# Altium PCB SolarArray3.PcbDoc
Units mm, origin at the board's own origin, x right, y up, seen from the top; angles counter-clockwise.
Board outline 82 x 320 mm, 2 copper layers (Top Layer, Bottom Layer), stack 1.567 mm thick; 67 components, 37 nets, 167 pads, 4 vias.
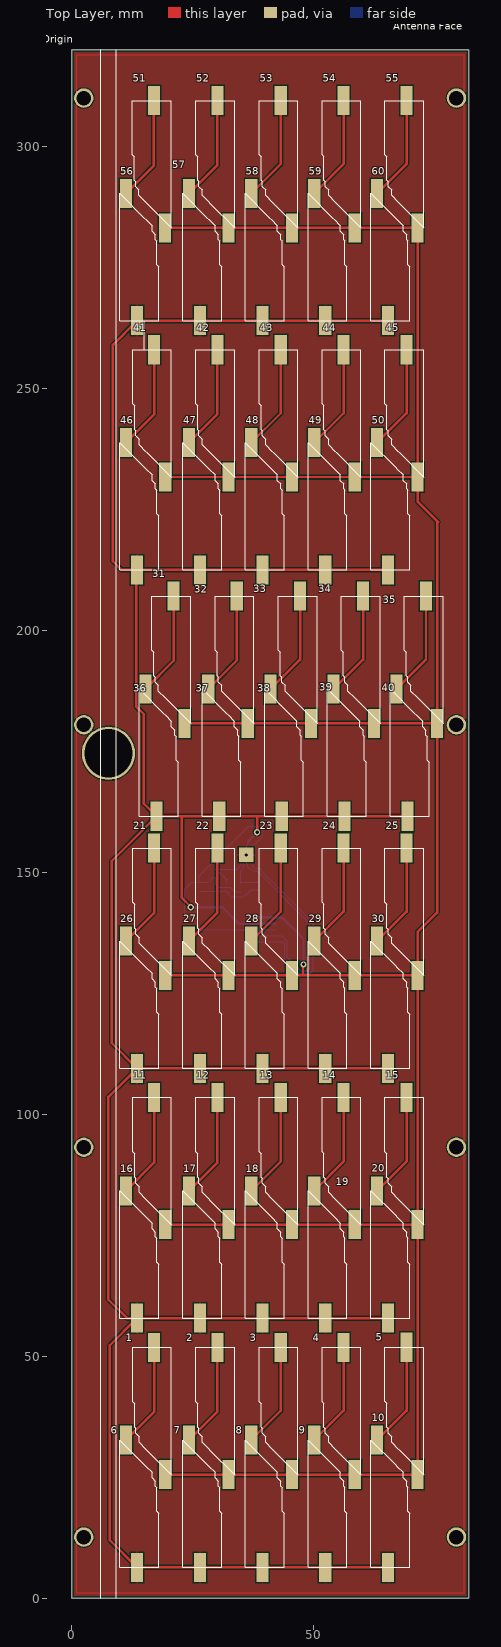
[diagram p0: Top Layer view]
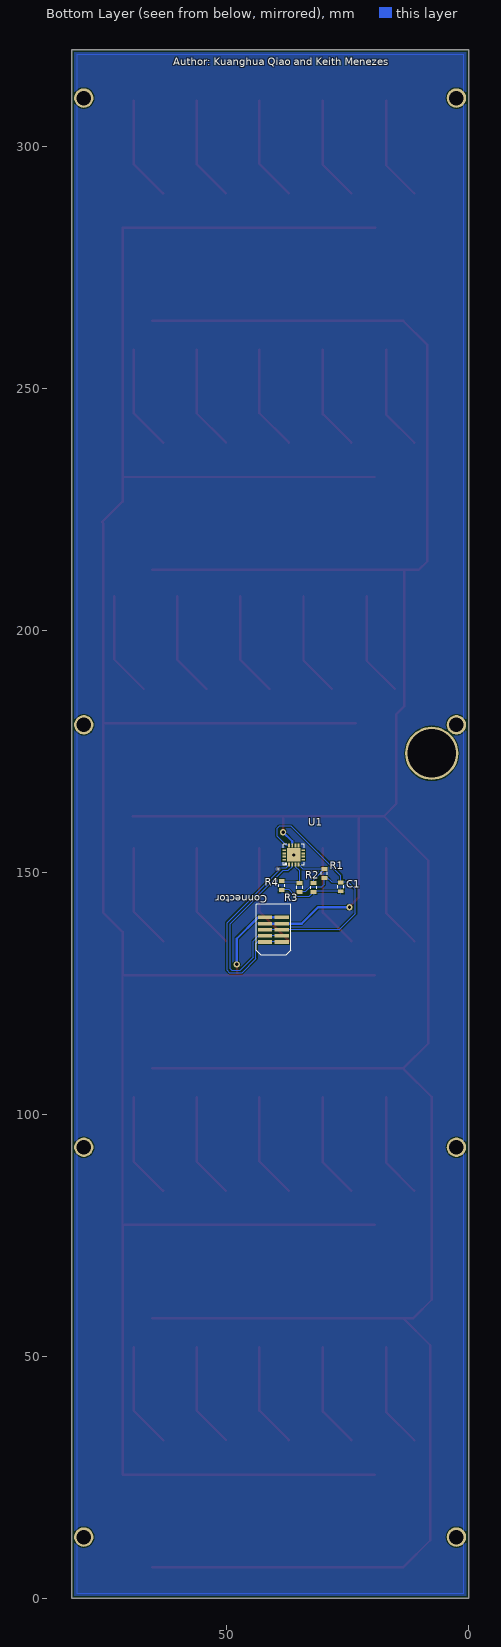
[diagram p1: Bottom Layer view, seen from below]
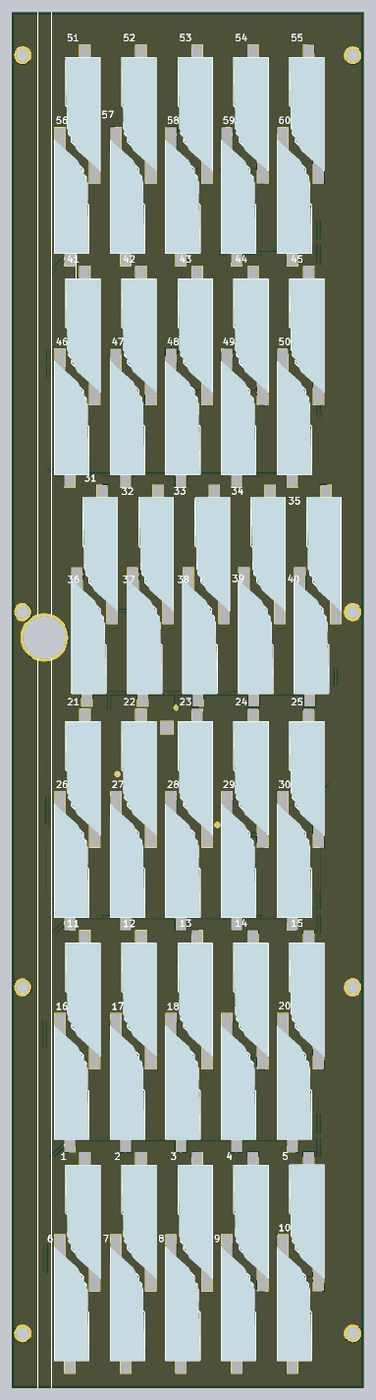
[diagram p2: 3D render of the assembled board from above, using the file's embedded part models]

## Layer stack, top to bottom
Top Solder: solder mask 0.0102, Solder Resist, Dk 3.5
Top Layer: signal copper 0.0356
Dielectric 1: dielectric 1.4961, FR-4, Dk 4.8
Bottom Layer: signal copper 0.0356
Bottom Solder: solder mask 0.0102, Solder Resist, Dk 3.5

## Board outline
82,0 82,320 0,320 0,0

## Design rules (kind name [scope] priority, off if disabled: settings)
Clearance [All] p1: gap=0.254 ignorepadtopadclearanceinfootprint=FALSE except(0: Arc-Hole Track-Hole SMDPad-Hole THPad-Hole Via-Hole Fill-Hole Poly-Hole Region-Hole Text-Hole)
PolygonConnect [All] p1: connectstyle=Relief reliefconductorwidth=0.254 reliefentries=4 polygonreliefangle="90 Angle" airgapwidth=0.254
RoutingVias [All] p1: holewidth=0.711 width=1.27 viastyle="Through Hole" minholewidth=0.711 minwidth=1.27 maxholewidth=0.711 maxwidth=1.27
SolderMaskExpansion [All] p1: expansion=0.102
Width [All] p1: maxlimit=1 minlimit=0.254 preferedwidth=0.254 minimp=50.000000 maximp=50.000000 favimp=50.000000
30 further rules are at their usual default settings.

## Components (designator, comment, footprint, x,y, rotation, side; value= is the part's Value field where it differs from the comment)
1 "Trisol X Solar Wing" PCBComponent_1 20.6,22.376 r90 top
2 "Trisol X Solar Wing" PCBComponent_1 33.656,22.376 r90 top
3 "Trisol X Solar Wing" PCBComponent_1 46.756,22.376 r90 top
4 "Trisol X Solar Wing" PCBComponent_1 59.756,22.376 r90 top
5 "Trisol X Solar Wing" PCBComponent_1 72.766,22.416 r90 top
6 "Trisol X Solar Wing" PCBComponent_1 9.944,35.864 r270 top
7 "Trisol X Solar Wing" PCBComponent_1 22.944,35.864 r270 top
8 "Trisol X Solar Wing" PCBComponent_1 35.844,35.864 r270 top
9 "Trisol X Solar Wing" PCBComponent_1 48.844,35.864 r270 top
10 "Trisol X Solar Wing" PCBComponent_1 61.844,35.864 r270 top
11 "Trisol X Solar Wing" PCBComponent_1 20.6,74.036 r90 top
12 "Trisol X Solar Wing" PCBComponent_1 33.656,74.036 r90 top
13 "Trisol X Solar Wing" PCBComponent_1 46.756,74.036 r90 top
14 "Trisol X Solar Wing" PCBComponent_1 59.756,74.036 r90 top
15 "Trisol X Solar Wing" PCBComponent_1 72.766,74.036 r90 top
16 "Trisol X Solar Wing" PCBComponent_1 9.944,87.364 r270 top
17 "Trisol X Solar Wing" PCBComponent_1 22.944,87.364 r270 top
18 "Trisol X Solar Wing" PCBComponent_1 35.844,87.364 r270 top
19 "Trisol X Solar Wing" PCBComponent_1 48.844,87.364 r270 top
20 "Trisol X Solar Wing" PCBCOMPONENT_1 61.844,87.364 r270 top
21 "Trisol X Solar Wing" PCBComponent_1 20.6,125.536 r90 top
22 "Trisol X Solar Wing" PCBComponent_1 33.656,125.536 r90 top
23 "Trisol X Solar Wing" PCBComponent_1 46.756,125.536 r90 top
24 "Trisol X Solar Wing" PCBComponent_1 59.756,125.536 r90 top
25 "Trisol X Solar Wing" PCBComponent_1 72.766,125.536 r90 top
26 "Trisol X Solar Wing" PCBComponent_1 9.944,138.964 r270 top
27 "Trisol X Solar Wing" PCBComponent_1 22.944,138.964 r270 top
28 "Trisol X Solar Wing" PCBComponent_1 35.844,138.964 r270 top
29 "Trisol X Solar Wing" PCBComponent_1 48.844,138.964 r270 top
30 "Trisol X Solar Wing" PCBComponent_1 61.844,138.964 r270 top
31 "Trisol X Solar Wing" PCBComponent_1 24.6,177.636 r90 top
32 "Trisol X Solar Wing" PCBComponent_1 37.656,177.636 r90 top
33 "Trisol X Solar Wing" PCBComponent_1 50.756,177.636 r90 top
34 "Trisol X Solar Wing" PCBComponent_1 63.756,177.636 r90 top
35 "Trisol X Solar Wing" PCBComponent_1 76.766,177.636 r90 top
36 "Trisol X Solar Wing" PCBComponent_1 13.944,191.064 r270 top
37 "Trisol X Solar Wing" PCBComponent_1 26.944,191.064 r270 top
38 "Trisol X Solar Wing" PCBComponent_1 39.844,191.064 r270 top
39 "Trisol X Solar Wing" PCBComponent_1 52.844,191.064 r270 top
40 "Trisol X Solar Wing" PCBComponent_1 65.844,191.064 r270 top
41 "Trisol X Solar Wing" PCBComponent_1 20.6,228.536 r90 top
42 "Trisol X Solar Wing" PCBComponent_1 33.656,228.536 r90 top
43 "Trisol X Solar Wing" PCBComponent_1 46.756,228.536 r90 top
44 "Trisol X Solar Wing" PCBComponent_1 59.756,228.536 r90 top
45 "Trisol X Solar Wing" PCBComponent_1 72.766,228.536 r90 top
46 "Trisol X Solar Wing" PCBComponent_1 9.944,241.964 r270 top
47 "Trisol X Solar Wing" PCBComponent_1 22.944,241.964 r270 top
48 "Trisol X Solar Wing" PCBComponent_1 35.844,241.964 r270 top
49 "Trisol X Solar Wing" PCBComponent_1 48.844,241.964 r270 top
50 "Trisol X Solar Wing" PCBComponent_1 61.844,241.964 r270 top
51 "Trisol X Solar Wing" PCBComponent_1 20.556,280.036 r90 top
52 "Trisol X Solar Wing" PCBComponent_1 33.656,280.036 r90 top
53 "Trisol X Solar Wing" PCBComponent_1 46.756,280.036 r90 top
54 "Trisol X Solar Wing" PCBComponent_1 59.756,280.036 r90 top
55 "Trisol X Solar Wing" PCBComponent_1 72.766,280.036 r90 top
56 "Trisol X Solar Wing" PCBComponent_1 9.944,293.464 r270 top
57 "Trisol X Solar Wing" PCBComponent_1 22.944,293.464 r270 top
58 "Trisol X Solar Wing" PCBComponent_1 35.844,293.464 r270 top
59 "Trisol X Solar Wing" PCBComponent_1 48.844,293.464 r270 top
60 "Trisol X Solar Wing" PCBComponent_1 61.844,293.464 r270 top
C1 "100pF" 0805 26.4,147 r90 bottom
Connector "TFC-105-02-F-D" TFC-105-X2-XX-D 40.314,138.16 r270 bottom
R1 "1K" 0805 29.8,149.8 r270 bottom
R2 "1K" 0805 32,146.886 r270 bottom
R3 "1K" 0805 34.9,146.9 r270 bottom
R4 "1K" 0805 38.6,147.3 r270 bottom
U1 "ADT7420UCPZ-R2" CP_16_17 36.1,153.6 r90 bottom

## Footprints (in the part's own frame and the unit in brackets; to place one, negate y for a bottom-side part, rotate by r counter-clockwise, add the part's x,y. Pads: shape width x height; smd on the part's side, far side on the other; paste and mask are expansions set on the pad)
0805 [mil]
  rect 32x48 smd: 1(-35.43,0) 2(36,0)
  silkscreen extent -12,-24 12,24
CP_16_17 [mil]
  rect 30x14 smd: 1(-77.5,38.39) 2(-77.5,12.8) 3(-77.5,-12.8) 4(-77.5,-38.39) 9(77.5,-38.39) 10(77.5,-12.8) 11(77.5,12.8) 12(77.5,38.39)
  rect 14x30 smd: 5(-38.39,-77.5) 6(-12.8,-77.5) 7(12.8,-77.5) 8(38.39,-77.5) 13(38.39,77.5) 14(12.8,77.5) 15(-12.8,77.5) 16(-38.39,77.5)
  rect 110x110 smd paste-54.5: 17(0,0)
  silkscreen extent -86,-86 86,86, body extent -81,-81 81,81, height 30
PCBComponent_1 [mm]
  rect 6x2.5 smd: 0(3.164,1.27) 1(29.464,3.556)
  silkscreen extent 3.16,0 29.46,8.03, body extent 3.16,0.06 29.46,8.06, height 0.32
PCBCOMPONENT_1 [mm]
  rect 6x2.5 smd: 0(3.164,1.27) 1(29.464,3.556)
  silkscreen extent 3.16,0 29.46,8.03, body extent 3.16,0.06 29.46,8.06, height 0.32
TFC-105-X2-XX-D [mil]
  rect 29x115 smd mask+2: 1(-100,-67.5) 2(-100,67.5) 3(-50,-67.5) 4(-50,67.5) 5(0,-67.5) 6(0,67.5) 7(50,-67.5) 8(50,67.5) 9(100,-67.5) 10(100,67.5)
  silkscreen extent -208,-140 208,140, body extent -192,-122 183,113, height 220

## Part data
C1: library part CAP0805_1nF
R1 R2 R3 R4: library part RESISTOR0805-RES_1K
U1: "Imported"

## Free pads (board coordinates)
  round 4 hole 3: 1(2.5,12.65) 1(2.5,93.2) 1(2.5,180.5) 1(2.5,310) 1(79.5,12.65) 1(79.5,93.2) 1(79.5,180.5) 1(79.5,310)
  round 11 hole 10: 2(7.6,174.6)
  rect 3x3 smd: 4(36.1,153.6)

## Via types
v1: diameter 1.27, hole 0.711, Top Layer to Bottom Layer, 4 vias

## Nets (pads, with @x,y where several pads share a name; then routed paths per layer and width w, separated by ;. In a path a pad name is that pad's centre, name@x,y a point inside that pad or via, vN(x,y) a via of type N, cw(c..) or ccw(c..) an arc to the next point about the centre after c; other vN are vias at no path point)
Net1_0: 1.0 2.0 3.0 4.0 5.0 11.0 12.0 13.0 14.0 15.0 21.0 22.0 23.0 24.0 25.0 31.0 32.0 33.0 34.0 35.0 41.0 42.0 43.0 44.0 45.0 51.0 52.0 53.0 54.0 55.0 Connector.1 Connector.2 | length 592.9
  Top Layer w0.508: 51.0 52.0 53.0 54.0 55.0 45.0 ; 1.0 2.0 3.0 4.0 71.456,25.54 5.0 15.0 ; 11.0 12.0 13.0 14.0 15.0 ; 21.0 22.0 23.0 47.8,128.7 ; 41.0 42.0 43.0 44.0 45.0 ; 31.0 32.0 33.0 34.0 35.0 ; v1(47.9,131) 47.8,130.9 47.8,128.7 ; 47.8,128.7 24.0 25.0 ; 15.0 71.5,77.204 71.5,128.7 25.0 ; 25.0 71.496,137.696 75.496,141.696 35.0 ; 45.0 71.496,226.604 75.7,222.4 75.496,222.196 35.0
  Bottom Layer w0.254: Connector.1 Connector.1@42.129,140.6
  Bottom Layer w0.508: Connector.2 Connector.1 ; Connector.1@42.129,140.6 43.6,140.6 47.9,136.3 v1(47.9,131)
Net1_1: 1.1 6.0 | length 21.6
  Top Layer w0.508: 6.0 17.044,38.53 1.1
Net2_1: 2.1 7.0 | length 21.6
  Top Layer w0.508: 7.0 30.1,38.586 2.1
Net3_1: 3.1 8.0 | length 21.7
  Top Layer w0.508: 8.0 43.2,38.786 3.1
Net4_1: 4.1 9.0 | length 21.7
  Top Layer w0.508: 9.0 56.2,38.786 4.1
Net5_1: 5.1 10.0 | length 21.7
  Top Layer w0.508: 10.0 69.21,38.796 5.1
Net6_1: 6.1 7.1 8.1 9.1 10.1 16.1 17.1 18.1 19.1 20.1 26.1 27.1 28.1 29.1 30.1 36.1 37.1 38.1 39.1 40.1 46.1 47.1 48.1 49.1 50.1 56.1 57.1 58.1 59.1 60.1 C1.1 Connector.3 Connector.4 pad.4 R2.2 R4.2 U1.11 U1.17 | length 652
  Top Layer w0.508: v1(24.6,142.8) 24.6,142.9 22.7,144.8 22.7,161.6 ; v1(38.3,158.3) 38.3,161.6 ; 10.1 9.1 8.1 7.1 6.1 7.9,12 7.9,52.3 16.1 ; 20.1 19.1 18.1 17.1 16.1 ; 30.1 29.1 28.1 27.1 26.1 ; 50.1 49.1 48.1 47.1 46.1 ; 60.1 59.1 58.1 57.1 56.1 8.5,259 8.5,214.3 10.3,212.5 46.1 ; 40.1 39.1 38.1 38.3,161.6 ; 16.1 11.4,57.9 7.6,61.7 7.6,103.6 26.1 ; 26.1 8.3,114.7 8.3,152.4 36.1 ; 46.1 13.3,212.3 13.3,184.3 14.9,182.7 14.9,164.2 36.1 ; 36.1 22.7,161.6 ; 22.7,161.6 37.1 38.3,161.6
  Bottom Layer w0.254: C1.1 31.871,146.1 R2.2 32.971,145 35.469,145 35.891,145.421 36.121,145.421 37.086,146.386 R4.2 ; U1.11 36.429,155.573 36.429,156.167
  Bottom Layer w0.508: v1(24.6,142.8) 31.1,142.8 34.47,139.43 Connector.4 Connector.3 ; 36.429,156.167 36.429,156.429 v1(38.3,158.3)
  other v1: 36.1,153.6
Net11_1: 11.1 16.0 | length 21.7
  Top Layer w0.508: 16.0 17.044,90.03 11.1
Net12_1: 12.1 17.0 | length 21.7
  Top Layer w0.508: 17.0 30.1,90.086 12.1
Net13_1: 13.1 18.0 | length 21.8
  Top Layer w0.508: 18.0 43.2,90.286 13.1
Net14_1: 14.1 19.0 | length 21.8
  Top Layer w0.508: 19.0 56.2,90.286 14.1
Net15_1: 15.1 20.0 | length 21.8
  Top Layer w0.508: 20.0 69.21,90.296 15.1
Net21_1: 21.1 26.0 | length 21.6
  Top Layer w0.508: 26.0 17.044,141.63 21.1
Net22_1: 22.1 27.0 | length 21.6
  Top Layer w0.508: 27.0 30.1,141.686 22.1
Net23_1: 23.1 28.0 | length 21.7
  Top Layer w0.508: 28.0 43.2,141.886 23.1
Net24_1: 24.1 29.0 | length 21.7
  Top Layer w0.508: 29.0 56.2,141.886 24.1
Net25_1: 25.1 30.0 | length 21.7
  Top Layer w0.508: 30.0 69.21,141.896 25.1
Net31_1: 31.1 36.0 | length 21.6
  Top Layer w0.508: 36.0 21.044,193.73 31.1
Net32_1: 32.1 37.0 | length 21.6
  Top Layer w0.508: 37.0 34.1,193.786 32.1
Net33_1: 33.1 38.0 | length 21.7
  Top Layer w0.508: 38.0 47.2,193.986 33.1
Net34_1: 34.1 39.0 | length 21.7
  Top Layer w0.508: 39.0 60.2,193.986 34.1
Net35_1: 35.1 40.0 | length 21.7
  Top Layer w0.508: 40.0 73.21,193.996 35.1
Net41_1: 41.1 46.0 | length 21.6
  Top Layer w0.508: 46.0 17.044,244.63 41.1
Net42_1: 42.1 47.0 | length 21.6
  Top Layer w0.508: 47.0 30.1,244.686 42.1
Net43_1: 43.1 48.0 | length 21.7
  Top Layer w0.508: 48.0 43.2,244.886 43.1
Net44_1: 44.1 49.0 | length 21.7
  Top Layer w0.508: 49.0 56.2,244.886 44.1
Net45_1: 45.1 50.0 | length 21.7
  Top Layer w0.508: 50.0 69.21,244.896 45.1
Net51_1: 51.1 56.0 | length 21.6
  Top Layer w0.508: 56.0 17,296.086 51.1
Net52_1: 52.1 57.0 | length 21.6
  Top Layer w0.508: 57.0 30.1,296.186 52.1
Net53_1: 53.1 58.0 | length 21.7
  Top Layer w0.508: 58.0 43.2,296.386 53.1
Net54_1: 54.1 59.0 | length 21.7
  Top Layer w0.508: 59.0 56.2,296.386 54.1
Net55_1: 55.1 60.0 | length 21.7
  Top Layer w0.508: 60.0 69.21,296.396 55.1
NetC1_2: C1.2 Connector.5 Connector.6 R1.2 R3.2 U1.12 | length 63.3
  Bottom Layer w0.254: R3.2 33.7,145.986 32.786,146.9 30.4,146.9 29.8,147.5 R1.2 29.171,148.886 28.2,147.914 C1.2 ; U1.12 37.643,155.569 39.5,157.425 39.5,159.1 39.1,159.5 36.6,159.5 26.4,149.3 C1.2 ; Connector.5 Connector.6 26.74,138.16 23.4,141.5 23.4,146.5 24.814,147.914 C1.2
NetConnector_7: Connector.7 Connector.8 U1.2 | length 43.1
  Bottom Layer w0.254: U1.2 36.425,151.184 37.317,150.292 38.337,150.292 49.2,139.429 49.2,130.1 48.8,129.7 47.3,129.7 44.5,132.5 44.5,135.8 43.41,136.89 Connector.7 Connector.8
NetConnector_9: Connector.9 Connector.10 U1.1 | length 43.9
  Bottom Layer w0.254: U1.1 37.806,150.9 39,150.9 39.1,150.8 39.1,150.4 49.9,139.6 49.9,129.8 49.292,129.192 46.908,129.192 43.992,132.108 43.992,135.208 43.58,135.62 Connector.9 Connector.10
NetR1_1: R1.1 R2.1 U1.4 | length 9.5
  Bottom Layer w0.254: R2.1 32,148.5 R1.1 34.194,150.7 U1.4
NetR3_1: R3.1 R4.1 U1.3 | length 8.1
  Bottom Layer w0.254: U1.3 35.684,151.54 35.684,151.093 34.9,150.309 R3.1 35.1,148 38.4,148 R4.1
pads on no net: U1.5 U1.6 U1.7 U1.8 U1.9 U1.10 U1.13 U1.14 U1.15 U1.16

## Polygon pours and split planes (outlines as drawn)
Net6_1 on Top Layer (solid, pour order 11): 0.5,319.5 81.5,319.5 81.5,0.5 0.5,0.5
Net31_1 on Top Layer "Array_pos" (solid, shelved, pour order 9): 81,1 1,1 1,319 81,319
Net6_1 on Bottom Layer (solid, pour order 13): 0.5,319.5 81.5,319.5 81.5,0.5 0.5,0.5
Net6_1 on Bottom Layer "Array_neg" (solid, shelved, pour order 4): 1,319 81,319 81,1 1,1

## Silkscreen, mask and mechanical layers (free items; w line width, h text height)
Top Overlay:
  lines w0.254: 6.011,0 6.011,320 ; 9.21,0 9.21,320 ; 15,258 15,264
  text "Antenna Face" at 66.4,324.1 h1.52
  text "NX Origin" at -9.8,321.4 h1.52
Bottom Overlay:
  text "Author: Kuanghua Qiao and Keith Menezes" at 61,316.8 h1.52

## Text inside footprints (layer, text, board x,y; h text height)
Connector: Mechanical 1 "J1" at 45.09,138.606 h0.76 r90
U1: Bottom Overlay "*" at 38.259,150.171 h1.52 r270